# Altium PCB MULTIB.PcbDoc
Units mil, origin at the board's own origin, x right, y up, seen from the top; angles counter-clockwise.
Board outline 2990 x 2190 mil, 2 copper layers (Top Layer, Bottom Layer); 44 components, 45 nets, 197 pads, 34 vias.
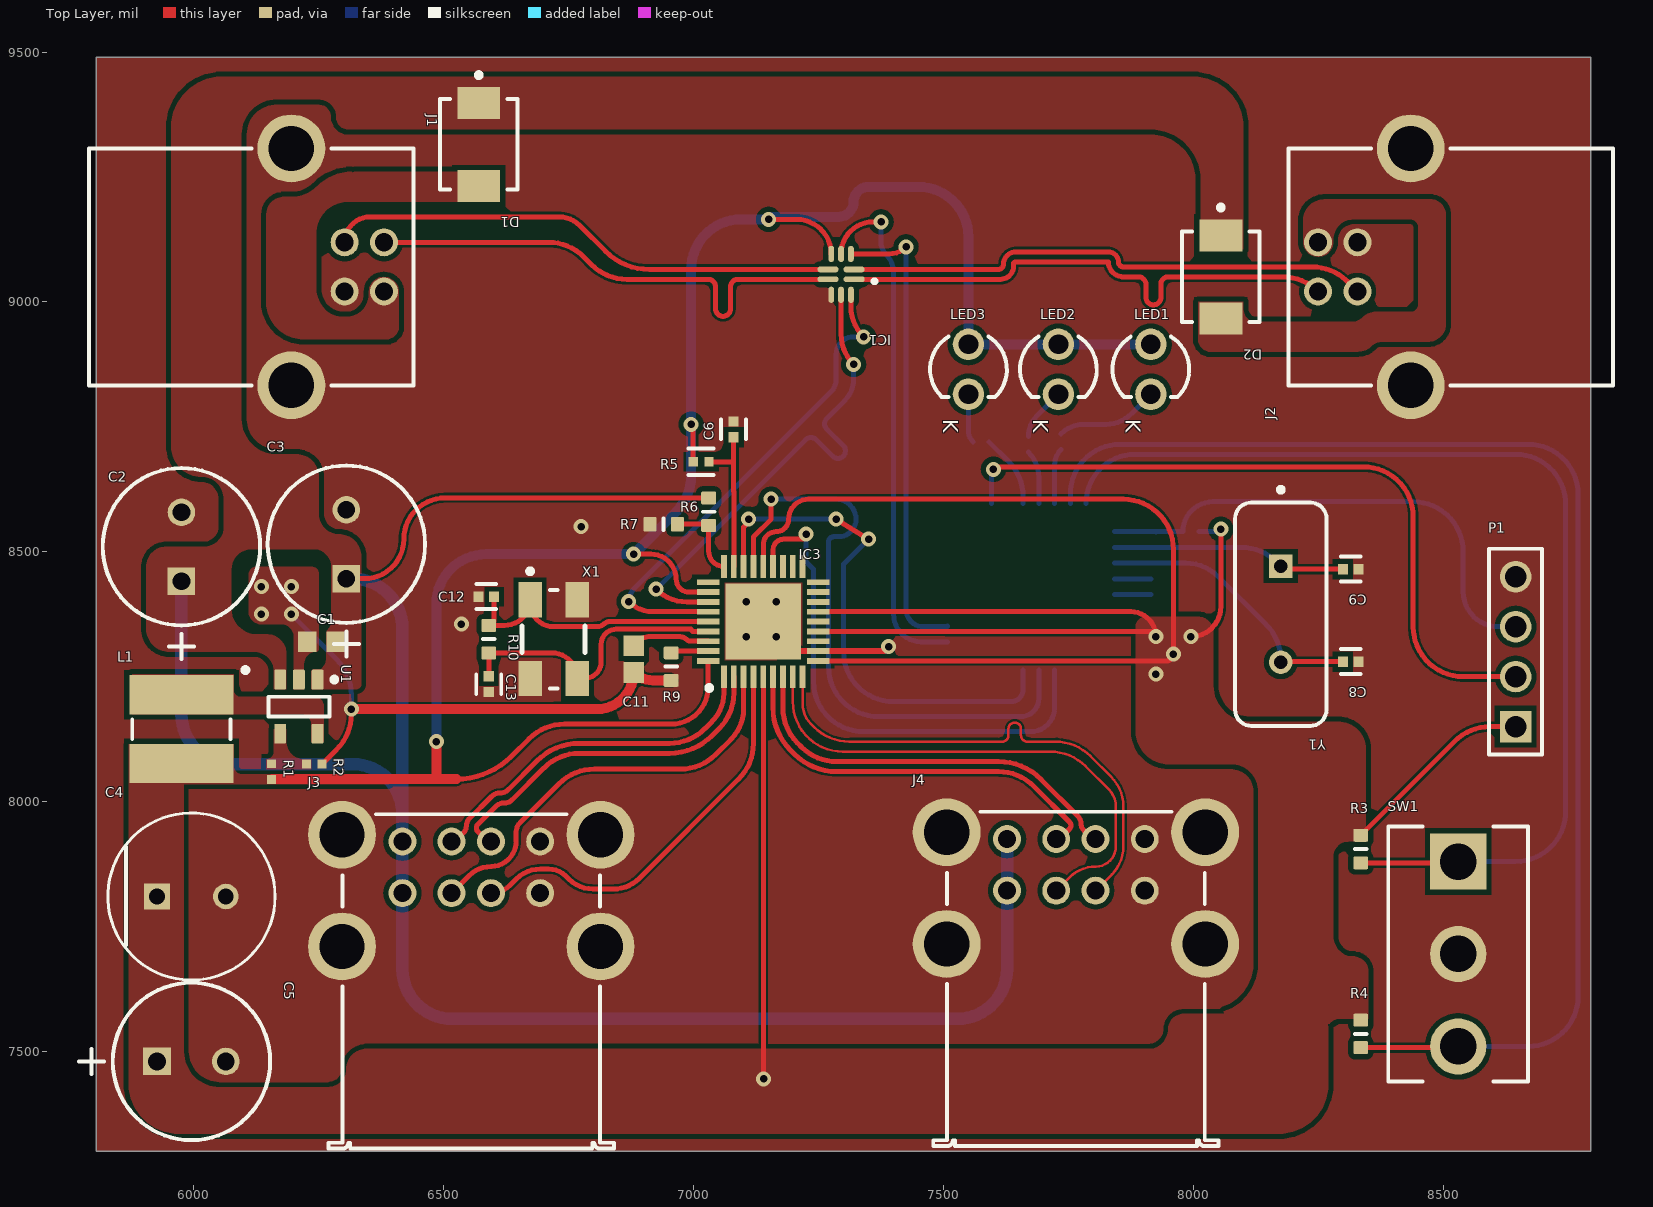
[diagram p0: Top Layer view]
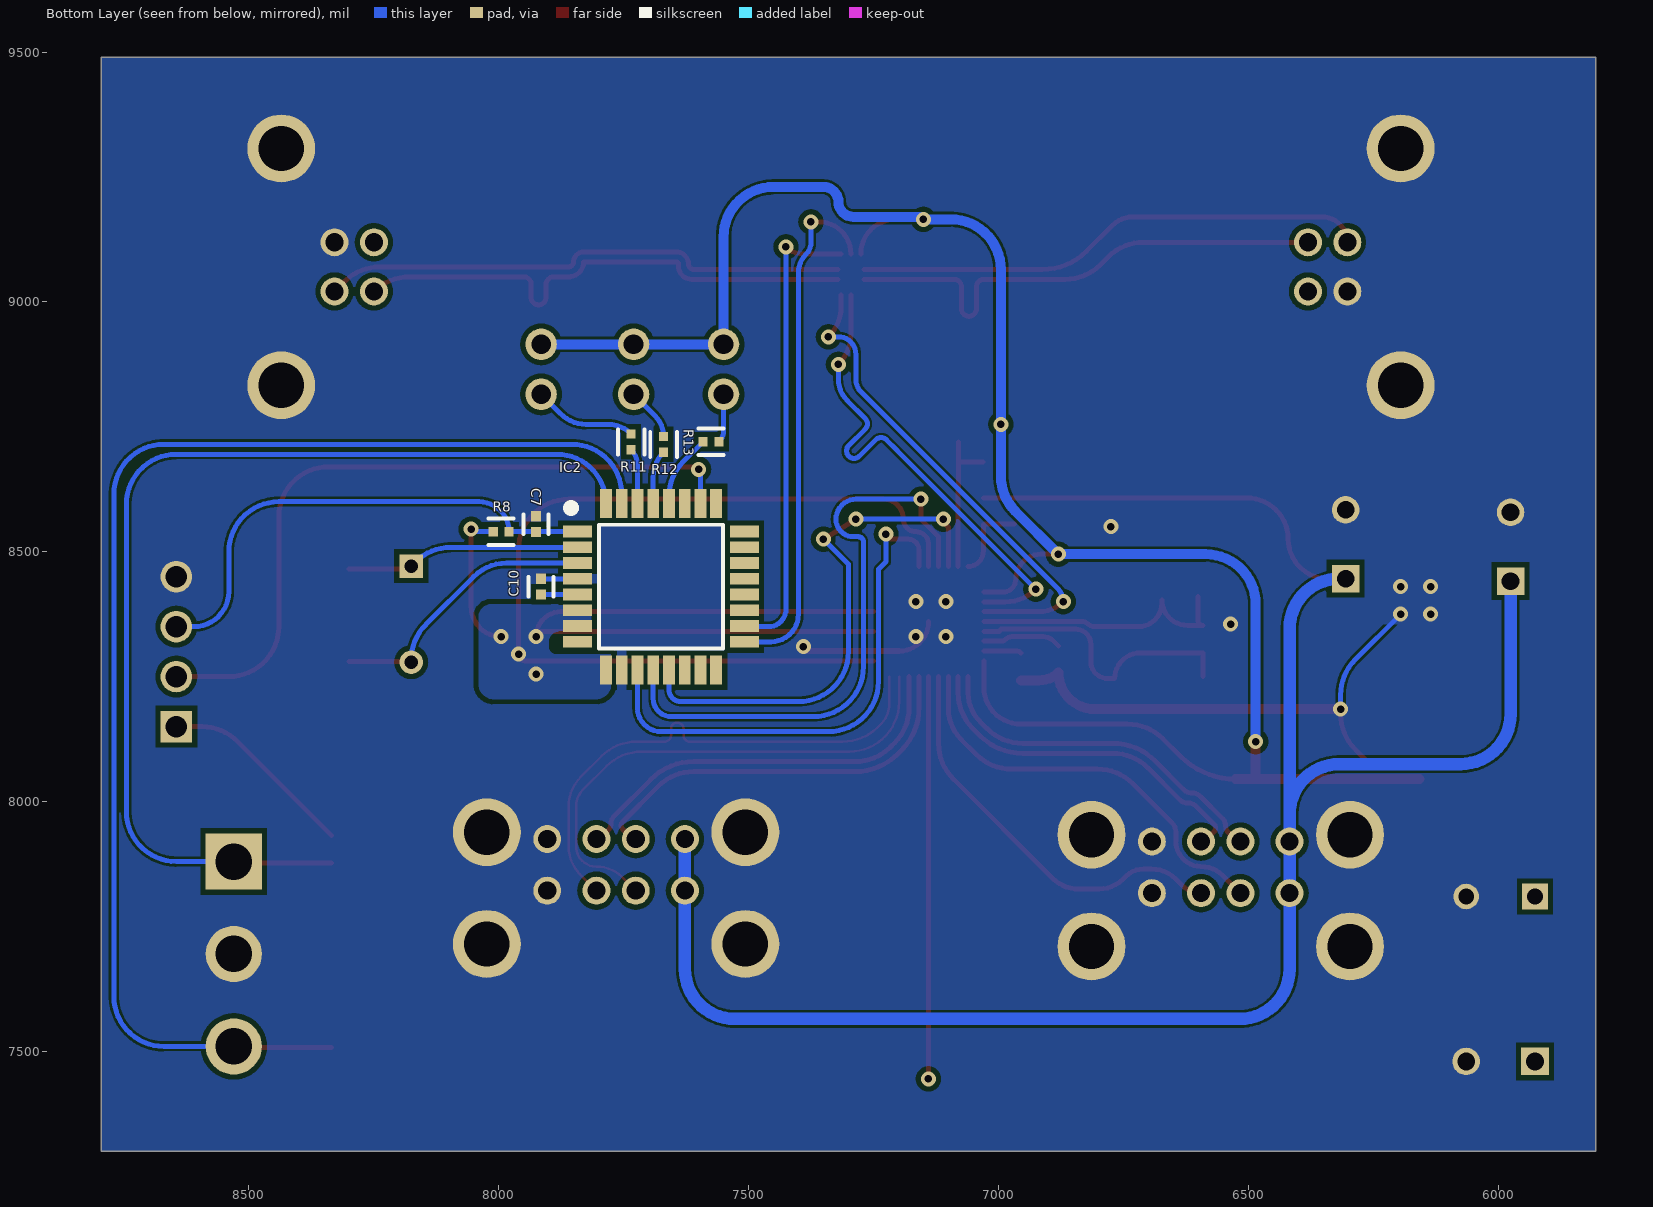
[diagram p1: Bottom Layer view, seen from below]
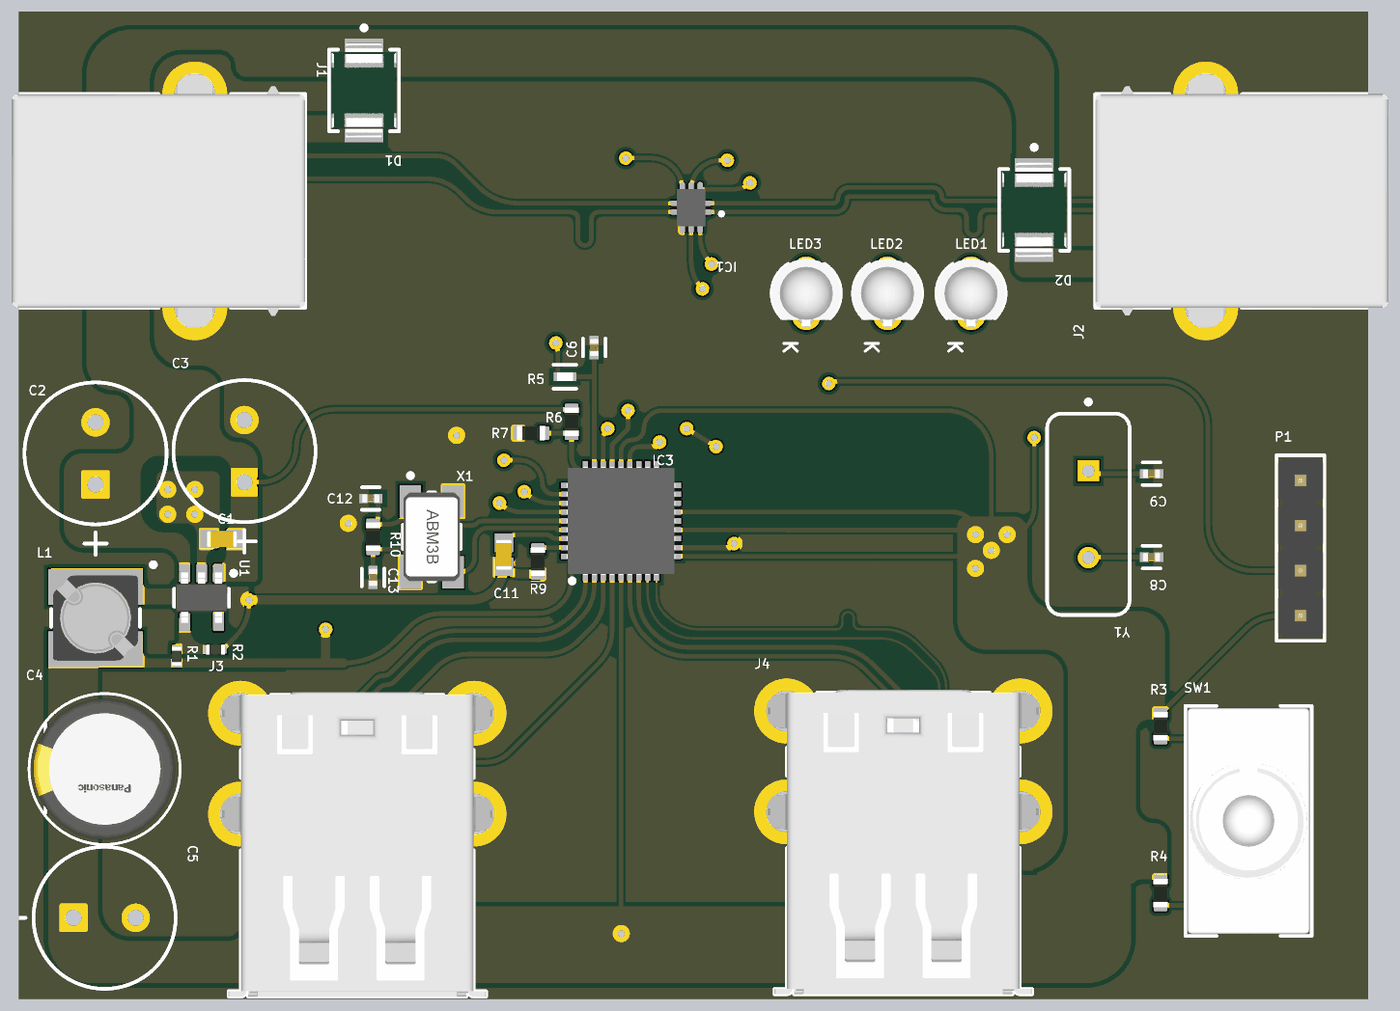
[diagram p2: 3D render of the assembled board from above, using the file's embedded part models]
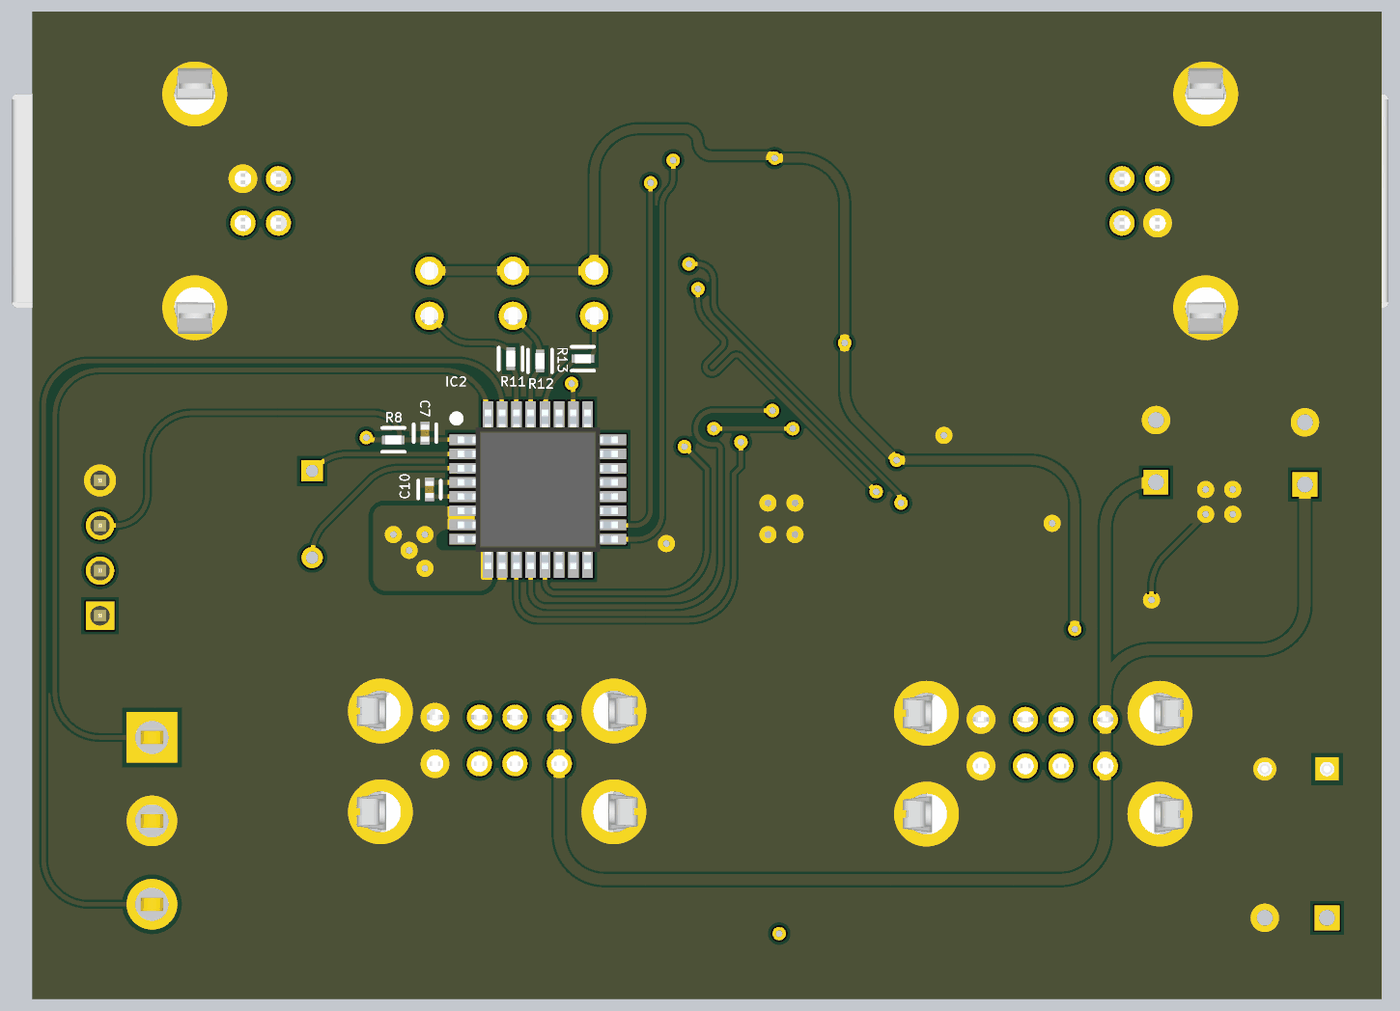
[diagram p3: 3D render of the assembled board from below, using the file's embedded part models]

## Layer stack, top to bottom
Top Solder: solder mask 0.4, Solder Resist, Dk 3.5
Top Layer: signal copper 1.4
Dielectric 1: dielectric 12.6, FR-4, Dk 4.8
Bottom Layer: signal copper 1.4
Bottom Solder: solder mask 0.4, Solder Resist, Dk 3.5

## Board outline
5805,7300 8795,7300 8795,9490 5805,9490

## Design rules (kind name [scope] priority, off if disabled: settings)
Clearance [All] p1: gap=5 ignorepadtopadclearanceinfootprint=TRUE except(0: Arc-Hole Track-Hole SMDPad-Hole THPad-Hole Via-Hole Fill-Hole Poly-Hole Region-Hole Text-Hole; 1: SMDPad-SMDPad SMDPad-THPad THPad-THPad; 4: Arc-Text Track-Text SMDPad-Text THPad-Text Via-Text Fill-Text Poly-Text Region-Text Text-Text; 10: SMDPad-Fill SMDPad-Poly SMDPad-Region THPad-Fill THPad-Poly THPad-Region Via-Fill Via-Poly Via-Region Fill-Fill Fill-Poly Fill-Region Poly-Poly Poly-Region Region-Region)
DiffPairsRouting [All] p1: maxlimit=100 minlimit=1 mostfreqgap=10 toplayer_minwidth=1 toplayer_maxwidth=15 toplayer_prefwidth=15 bottomlayer_minwidth=1 bottomlayer_maxwidth=15 bottomlayer_prefwidth=15 maxuncoupledlength=500
MinimumSolderMaskSliver [All] p1: minsoldermaskwidth=1
PlaneClearance [All] p1: clearance=50
PolygonConnect [All] p1: connectstyle=Direct reliefconductorwidth=10 reliefentries=4 polygonreliefangle="90 Angle" airgapwidth=10
RoutingTopology [All] p1: topology=Daisy_Balanced
RoutingVias [All] p1: holewidth=28 width=50 viastyle="Through Hole" minholewidth=28 minwidth=50 maxholewidth=28 maxwidth=50
SilkToSilkClearance [All] p1: silktosilkclearance=1
SilkToSolderMaskClearance [IsPad] p1: minsilkscreentomaskgap=1 clearancetoexposedcopper=TRUE
SolderMaskExpansion [All] p1: expansion=4 istentingtop=FALSE
Width [All] p1: maxlimit=100 minlimit=1 preferedwidth=10
24 further rules are at their usual default settings.

## Classes and differential pairs
differential pair USB_TOP_2: +USB_TOP_2_P -USB_TOP_2_N
differential pair USB_TOP_1: +USB_TOP_1_P -USB_TOP_1_N
differential pair USB_MUX: +USB_MUX_P -USB_MUX_N
differential pair USB_B4: +USB_B4_P -USB_B4_N
differential pair USB_B3: +USB_B3_P -USB_B3_N
differential pair USB_B2: +USB_B2_P -USB_B2_N
differential pair USB_B1: +USB_B1_P -USB_B1_N

## Components (designator, comment, footprint, x,y, rotation, side; value= is the part's Value field where it differs from the comment)
C1 "100nF" CAPC1608X90X35ML10T15 6255,8320 r0 top
C2 "100uF" CAPPR65-350-1150X800X1250 5975,8510 r90 top
C3 "100uF" CAPPR65-350-1150X800X1250 6305,8515 r90 top
C4 "220uF" FP-EEU-FC1V221L-MFG 5995,7810 r0 top
C5 "100uF" CAPPR65-350-1150X800X1250 5995,7480 r0 top
C6 "C0402  104" FP-C0402-BB-MFG 7080,8745 r90 top value="0.10 μF"
C7 "C0402  104" FP-C0402-BB-MFG 7925,8555 r270 bottom value="0.10 μF"
C8 "C0402" FP-C0402-BB-MFG 8315,8280 r180 top value="0.10 μF"
C9 "C0402" FP-C0402-BB-MFG 8315,8465 r180 top value="0.10 μF"
C10 "C0402" FP-C0402-BB-MFG 7915,8430 r90 bottom value="0.10 μF"
C11 "Capacitor 10 pF +/- 5% 50 V 0603" CAPC1608X90X40ML10T20 6880,8285 r90 top value=10pF
C12 "C0402" FP-C0402-BB-MFG 6585,8410 r0 top value="0.10 μF"
C13 "C0402" FP-C0402-BB-MFG 6590,8235 r270 top value="0.10 μF"
D1 "SMBJ5.0A-TR" FP-SMB-MFG 6570,9315 r270 top
D2 "SMBJ5.0A-TR" FP-SMB-MFG 8055,9050 r270 top
IC1 "USB3740B-AI9-TR" USB3740BAI9TR 7295,9055 r180 top
IC2 "STM8S105K4T6C" QFP80P900X900X160-32N 7675,8430 r180 bottom
IC3 "USB2514B-AEZC-TR" QFN50P600X600X100-37N-D 7139.37,8360.24 r90 top
J1 "61400416121" 61400416121 6115,9070 r270 top
J2 "61400416121" 61400416121 8515,9070 r90 top
J3 "61400826021" 61400826021 6555,7640 r0 top
J4 "61400826021" 61400826021 7765,7645 r0 top
L1 "10uH" "WE-SPC 4838" 5975,8145 r270 top
LED1 "151031SS06000" "Type 3mm" 7915,8865 r270 top
LED2 "151031SS06000" "Type 3mm" 7730,8865 r270 top
LED3 "151031SS06000" "Type 3mm" 7550,8865 r270 top
P1 "61300411121" 61300411121 8645,8300 r90 top
R1 "3.2kR" RESC1005X40X25LL05T05 6155,8060 r270 top
R2 "3.2kR" RESC1005X40X25LL05T05 6240.75,8075 r180 top
R3 "120R3J" RESC0603(1608)_L 8335,7905 r90 top value=51kΩ
R4 "120R3J" RESC0603(1608)_L 8335,7535 r90 top value=51kΩ
R5 "R0402" FP-CRCW0402-e3-IPC_C 7015,8680 r180 top
R6 "120R3J" RESC0603(1608)_L 7030,8580 r270 top value=51kΩ
R7 "120R3J" RESC0603(1608)_L 6940,8555 r0 top value=51kΩ
R8 "R0402" FP-CRCW0402-e3-IPC_C 7995,8540 r0 bottom
R9 "120R3J" RESC0603(1608)_L 6955,8270 r90 top value=12kΩ
R10 "120R3J" RESC0603(1608)_L 6590,8325 r270 top value=1MΩ
R11 "R0402" FP-CRCW0402-e3-IPC_C 7735,8720 r90 bottom
R12 "R0402" FP-CRCW0402-e3-IPC_C 7670,8715 r90 bottom
R13 "R0402" FP-CRCW0402-e3-IPC_C 7575,8720 r180 bottom
SW1 "A101SYCB04" FP-A101SYCB04-MFG 8530,7695 r0 top
U1 "LM3671MF-3.3/NOPB" DBV0005A_N 6210,8190 r270 top
X1 "ABM3B-24.000MHZ-B2-T" ABRA-ABM3B-4_V 6720,8325 r270 top
Y1 "FOXSLF/080-20" FOX-FOXSLF080-20 8175,8375 r270 top

## Footprints (in the part's own frame and the unit in brackets; to place one, negate y for a bottom-side part, rotate by r counter-clockwise, add the part's x,y. Pads: shape width x height; smd on the part's side, far side on the other; paste and mask are expansions set on the pad)
61300411121 [mm] "Pin Header, pitch 2.54 mm, THT, Vertical, single row, 4p"
  rect 1.6x1.6 hole 1.1: 1(-3.81,0)
  round 1.6 hole 1.1: 2(-1.27,0) 3(1.27,0) 4(3.81,0)
  silkscreen extent -5.23,-1.34 5.23,1.34, body extent -5.08,-1.27 5.08,1.27, height 8.57
61400416121 [mm] "USB 2.0 Type B Horizontal"
  round 1.42 hole 0.92: 1(1.25,6.74) 2(-1.25,6.74) 3(-1.25,4.74) 4(1.25,4.74)
  round 3.45 hole 2.3: Shell(-6.02,2.03) Shell(6.02,2.03)
  silkscreen extent -6.02,-8.25 6.02,8.25, body extent -7.48,-8.25 7.48,8.25, height 11.08
61400826021 [mm] "USB 2.0 Type A Horizontal Dual Stacked"
  round 1.42 hole 0.92: 1(-3.5,7.11) 2(-1,7.11) 3(1,7.11) 4(3.5,7.11) 5(-3.5,4.49) 6(-1,4.49) 7(1,4.49) 8(3.5,4.49)
  round 3.45 hole 2.3: Shell(-6.57,1.78) Shell(-6.57,7.46) Shell(6.57,1.78) Shell(6.57,7.46)
  silkscreen extent -7.25,-8.5 7.25,8.5, body extent -7.91,-8.5 7.91,8.65, height 15.93
ABRA-ABM3B-4_V [mm] "SMD, 4-Leads, Body 5x3.2mm"
  rect 1.8x1.2 smd: 1(-2,-1.2) 2(2,-1.2) 3(2,1.2) 4(-2,1.2)
  silkscreen extent -3.57,-1.6 2.5,1.6, body extent -2.5,-1.59 2.5,1.59, height 1.13
CAPC1608X90X35ML10T15 [mm] "Chip Capacitor, 2-Leads, Body 1.7x0.9mm, IPC Low Density"
  rect 0.95x1.05 smd: 1(-0.725,0) 2(0.725,0)
  body extent -0.85,-0.45 0.85,0.45, height 0.9
CAPC1608X90X40ML10T20 [mm] "Chip Capacitor, 2-Leads, Body 1.70x0.90mm, IPC Low Density"
  rect 1.05x1.05 smd: 1(-0.675,0) 2(0.675,0)
  body extent -0.85,-0.45 0.85,0.45, height 0.9
CAPPR65-350-1150X800X1250 [mm] "THD, 2-Leads, Dia 8mm, Body 11.5mm"
  rect 1.4x1.4 hole 0.9: 1(-1.75,0)
  round 1.4 hole 0.9: 2(1.75,0)
  silkscreen extent -5.71,-4 4,4, body extent -4,-4 4,4, height 12.5
DBV0005A_N [mm] "SOT23, 5-Leads, Body 3.05x1.75mm, Pitch 0.95mm, IPC Medium Density"
  rrect17% 1x0.6 smd: 1(-1.375,0.95) 2(-1.375,0) 3(-1.375,-0.95) 4(1.375,-0.95) 5(1.375,0.95)
  silkscreen extent -1.5,-1.55 0.5,1.93, body extent -1.42,-1.46 1.42,1.46, height 1.08
FOX-FOXSLF080-20 [mm] "THD, 2-Leads, Body 11.35x4.65mm"
  rect 1.2x1.2 hole 0.7: 1(-2.44,0)
  round 1.2 hole 0.7: 2(2.44,0)
  silkscreen extent -6.45,-2.33 5.68,2.33, body extent -5.67,-2.32 5.68,2.33, height 3.6
FP-A101SYCB04-MFG [mil]
  rect 112.37x112.37 hole 73 paste-39370.1 mask+0: 1(0,185)
  round 112.37 hole 73 paste-39370.1 mask+0: 2(0,0) 3(0,-185)
  silkscreen extent -140,-255 140,255, body extent -144,-259 144,259, height 10
FP-C0402-BB-MFG [mm]
  rect 0.52x0.52 smd paste+0 mask+0: 1(-0.4,0) 2(0.4,0)
  silkscreen extent -0.5,-0.64 0.5,0.64, body extent -0.5,-0.25 0.5,0.25, height 0.55
FP-CRCW0402-e3-IPC_C [mil]
  rect 18.43x18.6 smd paste+0 mask+0: 1(-15.83,0) 2(15.83,0)
  silkscreen extent -25,-27 25,27, body extent -29,-15 29,15, height 10
FP-EEU-FC1V221L-MFG [mm]
  rect 1.3x1.3 hole 0.8 paste-1000 mask+0: 1(-1.75,0)
  round 1.3 hole 0.8 paste-1000 mask+0: 2(1.75,0)
  silkscreen extent -4.25,-4.25 4.25,4.25, body extent -4.35,-4.35 4.35,4.35, height 0.25
FP-SMB-MFG [mm]
  rect 1.62x2.18 smd paste+0 mask+0: 1(-2.11,0) 2(2.11,0)
  silkscreen extent -3.65,-1.98 2.3,1.98, body extent -3.02,-2.07 3.02,2.07, height 0.25
QFN50P600X600X100-37N-D [mm]
  rect 1.15x0.3 smd: 1(-2.8,2) 2(-2.8,1.5) 3(-2.8,1) 4(-2.8,0.5) 5(-2.8,0) 6(-2.8,-0.5) 7(-2.8,-1) 8(-2.8,-1.5) 9(-2.8,-2) 19(2.8,-2) 20(2.8,-1.5) 21(2.8,-1) 22(2.8,-0.5) 23(2.8,0) 24(2.8,0.5) 25(2.8,1) 26(2.8,1.5) 27(2.8,2)
  rect 0.3x1.15 smd: 10(-2,-2.8) 11(-1.5,-2.8) 12(-1,-2.8) 13(-0.5,-2.8) 14(0,-2.8) 15(0.5,-2.8) 16(1,-2.8) 17(1.5,-2.8) 18(2,-2.8) 28(2,2.8) 29(1.5,2.8) 30(1,2.8) 31(0.5,2.8) 32(0,2.8) 33(-0.5,2.8) 34(-1,2.8) 35(-1.5,2.8) 36(-2,2.8)
  rect 3.85x3.85 smd: 37(0,0)
  silkscreen extent -3.5,2.62 -3.25,2.87, body extent -3.05,-3.05 3.05,3.05, height 1
QFP80P900X900X160-32N [mm]
  rect 1.475x0.6 smd: 1(-4.238,2.8) 2(-4.238,2) 3(-4.238,1.2) 4(-4.238,0.4) 5(-4.238,-0.4) 6(-4.238,-1.2) 7(-4.238,-2) 8(-4.238,-2.8) 17(4.238,-2.8) 18(4.238,-2) 19(4.238,-1.2) 20(4.238,-0.4) 21(4.238,0.4) 22(4.238,1.2) 23(4.238,2) 24(4.238,2.8)
  rect 0.6x1.475 smd: 9(-2.8,-4.238) 10(-2,-4.238) 11(-1.2,-4.238) 12(-0.4,-4.238) 13(0.4,-4.238) 14(1.2,-4.238) 15(2,-4.238) 16(2.8,-4.238) 25(2.8,4.238) 26(2,4.238) 27(1.2,4.238) 28(0.4,4.238) 29(-0.4,4.238) 30(-1.2,4.238) 31(-2,4.238) 32(-2.8,4.238)
  silkscreen extent -4.77,-3.15 3.15,4.2, body extent -4.5,-4.5 4.5,4.5, height 1.6
RESC0603(1608)_L [mil] "Chip Resistor, Body 1.6x0.8mm, IPC High Density"
  rrect25% 26x29.92 smd: 1(-27.56,0) 2(27.56,0)
  silkscreen extent 0,-12 0,12, body extent -31,-16 31,16, height 18
RESC1005X40X25LL05T05 [mm] "Chip Resistor, 2-Leads, Body 1.05x0.55mm, IPC High Density"
  rect 0.45x0.45 smd: 1(-0.4,0) 2(0.4,0)
  body extent -0.53,-0.28 0.53,0.28, height 0.4
"Type 3mm" [mm] "THT, LED-3mm, 2pin- Body 4.15mm(max)"
  round 1.6 hole 1: 1(1.27,0) 2(-1.27,0)
  silkscreen extent -1.66,-1.95 1.4,1.95, body extent -1.93,-1.94 1.87,1.94, height 10.5
USB3740BAI9TR [mm]
  rrect100% 1.075x0.3 smd: 1(-0.663,0.25) 2(-0.663,-0.25) 6(0.663,-0.25) 7(0.663,0.25)
  rrect100% 0.3x0.825 smd: 3(-0.5,-1.037) 4(0,-1.037) 5(0.5,-1.037) 8(0.5,1.038) 9(0,1.038) 10(-0.5,1.038)
  silkscreen extent -1.8,0.25 -1.6,0.45, body extent -0.8,-1.05 0.8,1.05, height 0.7
"WE-SPC 4838" [mm] "SMD Inductor, 2- pin, Body 4.80 x 4.80mm"
  rect 2x5.3 smd: 1(-1.75,0) 2(1.75,0)
  silkscreen extent -3.12,-2.5 0.5,3.37, body extent -2.41,-2.41 2.41,2.41, height 3.8

## Part data
C1: library part CMP-2000-04945-1, "Chip Capacitor, 22 pF, +/- 5%, 50 V, -55 to 125 degC, 0603 (1608 Metric), RoHS, Tape and Reel", Capacitance=22pF, Case Size/Dimension=0603, Dielectric=C0G, Manufacturer=Murata, Package Description="2-Pin Surface Mount Device, Body 1.6 x 0.8 mm", Package Reference=603, Rated Voltage=50V, Tolerance (%)=±5%, Datasheet URL=https://datasheet.ciiva.com/11786/0900766b807a1cab-11786398.pdf, Datasheet Version=Jul-06, Manufacturer URL=http://www.murata.com/
C2 C3 C5: library part CMP-1665-00042-2, "Aluminum Electrolytic Capacitor, 100 uF, +/- 20%, 50 V, -40 to 85 degC, 2-Pin THD, RoHS, Bulk", Case/Package=Radial, Dielectric Material=Aluminium, Leakage Current=3uA, Manufacturer=Panasonic, Max Operating Temperature=85degC, Min Operating Temperature=-40degC, Package Description="2-Pin Radial Lead, Dia 8 mm, Height 12.5 mm", Package Quantity=200, Package Reference=CAPPR65-350-1150X800X1250, Ripple Current=250mA, Tolerance=20%, Voltage=50V, Capacitance=100uF, Datasheet URL=https://industrial.panasonic.com/cdbs/www-data/pdf/RDF0000/ABA0000C1218.pdf, Datasheet Version="Rev. 05, 10/2016", Diameter=8mm, Dissipation Factor=0.12%, Height=11.5mm, Height - Seated (Max)=0.492inch, Lead Diameter=0.6mm, Lead Free=LeadFree, Lead Pitch=3.5mm, Lead/Base Style=Straight, Length=11.5mm, Life (Hours)=2000Hour, Manufacturer URL=http://www.panasonic.com/, Mount=ThroughHole, Number of Pins=2, Packaging=Bulk, Polarity=Polar, Radiation Hardening=No, REACH SVHC=NoSVHC, Ripple Current (AC)=250mA, RoHSCompliant=true, Termination=Radial, Voltage Rating=50V, Voltage Rating (DC)=50V
C4: library part CMP-05427-000010-1, "CAP ALUM 220UF 20% 35V RADIAL", Leakage Current=77uA, Manufacturer="Panasonic Electronic Components", Manufacturer Part Number=EEU-FC1V221L, Package=0, Ripple Current=730mA, Temperature="-55°C to +105°C", Temperature Range High=+105°C, Temperature Range Low=-55°C, Tolerance=20%, Voltage Rating=35V, Automotive=Yes, Automotive Grade="Grade 2", Capacitance=220uF, Category=Cap, ComponentLink2Description=Datasheet, ComponentLink2URL=https://industrial.panasonic.com/cdbs/www-data/pdf/RDF0000/ABA0000C1209.pdf, Device Class L1="Passive Components", Device Class L2=Capacitors, Device Class L3="Aluminum Electrolytic Capacitors", Digikey Description="CAP ALUM 220UF 20% 35V RADIAL", Dissipation Factor=12%, ESR=0.085Ω, Height=16.5mm, Lead Free=Yes, Life=2000Hours, Material=Aluminum, Mouser Description="Capacitor; Aluminum Electrolytic; Fc Radial Elec Cap 220uF 35V", Octopart=https://octopart.com/eeu-fc1v221l-panasonic-39478519, RoHS=TRUE
C6 C7 C8 C9 C10 C12 C13: library part CMP-2008-02046-2, "CAP CER 0.1UF 10V X5R 0402", Capacitance="0.10 μF", Manufacturer=Kemet, Manufacturer Part Number=C0402C104K8PACTU, Package=C0402-BB, Temperature="-55°C to +125°C", Temperature Characteristic=X5R, Temperature Coefficient=15%, Temperature Range High=+125°C, Temperature Range Low=-55°C, Tolerance=0.1, Voltage Rating="10 V", Automotive=No, Category=Cap, ComponentLink2Description=Datasheet, ComponentLink2URL=https://content.kemet.com/datasheets/KEM_C1002_X7R_SMD.pdf, Device Class L1="Passive Components", Device Class L2=Capacitors, Device Class L3="Ceramic Capacitors", Digikey Description="CAP CER 0.1UF 10V X5R 0402", Height=0.55mm, Ipc Land Pattern Name=CAPC10050X50, Lead Free=Yes, Material=Ceramic, Mouser Description="Capacitor 100 nF 10 VDC 0402", Octopart=https://octopart.com/c0402c104k8pactu-kemet-140039, RoHS=TRUE
C11: library part CMP-001-00014-4, "Chip Capacitor, 10 pF, +/- 5%, 50 V, 0603 (1608 Metric)", Capacitor Type=Ceramic, Case/Package=0603, Max Operating Temperature=125°C, Min Operating Temperature=-55°C, Tolerance=5%, Voltage Rating=50V, Mounting Technology=SM, Pins=2, RoHS Compliant=True
D1 D2: library part CMP-12225-000019-1, "TVS DIODE 5V 13.4V SMB", Breakdown Voltage=6.4V, Clamping Voltage=14.4V, Manufacturer=STMicroelectronics, Max Junction Temp=+150°C, Package=SMB, Peak Pulse Current=275A, Peak Pulse Power=600W, Reverse Standoff Voltage=5V, Temperature="-55°C to +150°C", Temperature Range Low=-55°C, Automotive=No, Category=Diode, ComponentLink2Description=Datasheet, ComponentLink2URL=https://www.st.com/resource/en/datasheet/smbj.pdf, Device Class L1="Circuit Protection", Device Class L2="TVS Diodes", Device Class L3=unset, Digikey Description="TVS DIODE 5V 13.4V SMB", Direction=Unidirectional, Height=2.65mm, Lead Free=Yes, Manufacturer Part Number=SMBJ5.0A-TR, Mouser Description="SMBJ Series 600 W 5 V Uni Directional SMT TVS Diode - DO-214AA", Number Of Channels=1, Octopart=https://octopart.com/smbj5.0a-tr-stmicroelectronics-347079, RoHS=TRUE, Standoff Height=0.05mm, Temperature Range High=+150°C
IC1: "Integrated Circuit", Manufacturer_Name=Microchip, Mouser Part Number=886-USB3740B-AI9-TR, Arrow Part Number=USB3740B-AI9-TR, Arrow Price/Stock=https://www.arrow.com/en/products/usb3740b-ai9-tr/microchip-technology, Datasheet Link=http://www.microchip.com/mymicrochip/filehandler.aspx?ddocname=en562428, Height=0.6mm, Manufacturer_Part_Number=USB3740B-AI9-TR, Mouser Price/Stock=https://www.mouser.co.uk/ProductDetail/Microchip-Technology/USB3740B-AI9-TR/?qs=pA5MXup5wxFFkk8V1NniAg%3D%3D
IC2: "Integrated Circuit", Manufacturer_Name=STMicroelectronics, Mouser Part Number=511-STM8S105K4T6C, Arrow Part Number=STM8S105K4T6C, Arrow Price/Stock=https://www.arrow.com/en/products/stm8s105k4t6c/stmicroelectronics, Datasheet Link=http://www.st.com/st-web-ui/static/active/en/resource/technical/document/datasheet/CD00200092.pdf, Height=1.6mm, Manufacturer_Part_Number=STM8S105K4T6C, Mouser Price/Stock=https://www.mouser.co.uk/ProductDetail/STMicroelectronics/STM8S105K4T6C?qs=YSp3DhtTcU05QnjDVzmM7w%3D%3D
IC3: "Integrated Circuit", Manufacturer_Name=Microchip, Mouser Part Number=886-USB2514B-AEZC-TR, Arrow Part Number=USB2514B-AEZC-TR, Arrow Price/Stock=https://www.arrow.com/en/products/usb2514b-aezc-tr/microchip-technology, Datasheet Link=http://ww1.microchip.com/downloads/en/DeviceDoc/00001692C.pdf, Height=1mm, Manufacturer_Part_Number=USB2514B-AEZC-TR, Mouser Price/Stock=https://www.mouser.co.uk/ProductDetail/Microchip-Technology/USB2514B-AEZC-TR?qs=pA5MXup5wxH7Kbx1p0cM6A%3D%3D
J1 J2: library part CMP-1502-03243-1, "USB 2.0 Type B Receptacle WR-COM, Horizontal, THT, with Pads and Pegs", Contact Resistance=20mOhm, Manufacturer="Wurth Elektronik", Operating Temperature=-40to105degC, Rated Current=1.5A, Working Voltage=30VAC, Connector Type=USB2.0TypeB, Datasheet URL=https://katalog.we-online.de/em/datasheet/61400416121.pdf, Gender=Receptacle, Manufacturer URL=http://www.we-online.de, Mounting Technology=THT, Orientation=Horizontal, Package Reference=61400416121, Packaging=Tray, Part Number=61400416121, Publisher=WurthElektronik
J3 J4: library part CMP-1502-03229-1, "USB 2.0 Type A Receptacle WR-COM, Stacked Horizontal, THT", Contact Resistance=20mOhm, Manufacturer="Wurth Elektronik", Operating Temperature=-40to105degC, Rated Current=1.5A, Working Voltage=30VAC, Connector Type=USB2.0TypeA, Datasheet URL=https://katalog.we-online.de/em/datasheet/61400826021.pdf, Gender=Receptacle, Manufacturer URL=http://www.we-online.de, Mounting Technology=THT, Orientation=StackedHorizontal, Package Reference=61400826021, Packaging=Tray, Part Number=61400826021, Publisher=WurthElektronik
L1: library part CMP-1401-00032-1, "SMD Shielded Power Inductor WE-SPC, L=10 µH", Inductance="10 ÂµH", Manufacturer="Wuerth Elektronik", PartNumber=74408943100, ComponentLink1Description="Manufacturer URL", ComponentLink1URL=http://www.we-online.com, ComponentLink2Description=Datasheet, ComponentLink2URL=http://katalog.we-online.de/kataloge/eisos/media/pdf/74408943100.pdf, PackageReference="WE-SPC 4838"
LED1 LED2 LED3: library part CMP-1488-00002-1, "THT LED round mono-color color lens, WL-TMRW, Super Red", Emitting color="Super Red", Manufacturer="Wuerth Elektronik", ComponentLink1Description="Manufacturer URL", ComponentLink1URL=http://www.we-online.com, ComponentLink2Description=Datasheet, ComponentLink2URL=http://katalog.we-online.de/pbs/datasheet/7448042001.pdfhttp://katalog.we-online.de/pbs/datasheet/7448042001.pdfhttp://katalog.we-online.de/pbs/datasheet/7448042001.pdfhttp://katalog.we-online.de/pbs/datasheet/151031SS06000.pdf, PackageReference="Type 3mm", PartNumber=151031SS06000
P1: library part CMP-1502-01064-1, "THT Vertical Pin Header WR-PHD, Pitch 2.54 mm, Single Row, 4 pins", Contact Resistance=20mOhm, Manufacturer="Wurth Elektronik", Operating Temperature=-40to105degC, Rated Current=3A, Withstanding Voltage=500VAC, Working Voltage=250VAC, Datasheet URL=https://katalog.we-online.de/em/datasheet/6130xx11121.pdf, Gender=Male, Manufacturer URL=http://www.we-online.de, Mounting Technology=THT, Orientation=Vertical, Package Reference=61300411121, Packaging=Bag, Part Number=61300411121, Pin Number=4, Pitch=2.54mm, Publisher=WurthElektronik, Row Number=Single
R1 R2: library part CMP-2002-01154-4, "Chip Resistor, 4.7 KOhm, +/- 1%, 0.1 W, -55 to 155 degC, 0402 (1005 Metric), RoHS, Tape and Reel", Case Code (Imperial)=0402, Case Code (Metric)=1005, Max Operating Temperature="155 degC", Min Operating Temperature="-55 degC", Package Quantity=1, PartNumber=ERJ-2RKF4701X, Power Rating="100 mW", Resistance="4.7 KOhm", Tolerance=1%, Voltage Rating="50 V", Case\/Package=0402, ComponentLink1Description="Manufacturer URL", ComponentLink1URL=http://www.panasonic.com/, ComponentLink2Description=Datasheet, ComponentLink2URL=http://industrial.panasonic.com/cdbs/www-data/pdf/RDA0000/AOA0000C86.pdf, DatasheetVersion=04/2015, Height="0.35 mm", Length="1 mm", Mount="Surface Mount", Mounting Technology="Surface Mount", PackageDescription="2-Pin Surface Mount Device, Body 1 x 0.5 mm", PackageReference=0402, Packaging="Cut Tape", Pins=2, Radiation Hardening=No, REACH SVHC=Yes, RoHSCompliant=true, Width="0.5 mm"
R3 R4 R6 R7 R9 R10: library part CMP-009-00069-1, "120R 0.1W 5% 0603 (1608 Metric)  SMD", Case/Package=0603, Power=0.1W, Tolerance=5%, Mounting Technology=SMT, Pins=2
R5 R8 R11 R12 R13: library part CMP-2002-08519-2, "RES Thick Film, 32.4kΩ, 1%, 0.063W, 100ppm/°C, 0402", Case Code (Imperial)=0402, Case Code (Metric)=1005, Max Operating Temperature=155°C, Max Power Dissipation=63mW, Min Operating Temperature=-55°C, Package Quantity=10, Resistance=32.4kR, Temperature Coefficient=100ppm/°C, Tolerance=1%, Voltage Rating=50V, Case/Package=0402, Composition="Thick Film", Contact Plating=Tin, Depth=0.5mm, Features="Automotive AEC-Q200", Height=0.35mm, Length=1mm, Military Standard=Not, Number of Pins=2, Number of Terminations=2, Packaging="Tape and Reel", Power Rating=63mW, Radiation Hardening=No, Termination=SMD/SMT, Weight=2.3E-05oz, Width=0.5mm
SW1: library part CMP-03408-000017-1, "SWITCH TOGGLE SPDT 0.4VA 20V", Actuator Color=Chrome, Contact Current Rating=400mA, Contact Resistance=10mR, Flammability Rating="UL94 V-1", Insulation Resistance=30MR, Max Operating Temperature=85°C, Max Voltage Rating (AC)=20V, Min Operating Temperature=-30°C, Package Quantity=100, Power Rating=400mW, Actuator Length=10.41mm, Actuator Material=Phenolic, Actuator Type="Standard Round", Contact Material=Copper, Contact Plating=Gold, Depth=6.86mm, Electrical Life=6000Cycles, ELV=Compliant, Illumination Type=Non-Illuminated, Lead Free="Lead Free", Max Voltage Rating (DC)=20V, Mount=Panel, Number of Poles=1, Number of Positions=2, Orientation=Straight, Packaging=Bulk, Radiation Hardening=No, REACH SVHC="No SVHC", RoHS Compliant=Yes, Series="Gemini A", Switch Function=On-On, Termination="PC Pins", Throw Configuration=SPDT, Voltage Rating (AC)=20V, Voltage Rating (DC)=20V
U1: library part CMP-0063-01132-3, "2MHz, 600mA Step-Down DC-DC Converter, 5-pin SOT-23, Pb-Free", Manufacturer="Texas Instruments", PackageTopMarking=SJEB*XTT, PowerWise=Y, ComponentLink1Description="Datasheet URL", ComponentLink1URL=http://www.ti.com/general/docs/lit/getliterature.tsp?genericPartNumber=LM3671&fileType=pdf, CompType=MiscPower, PackageDescription="Molded SOT-23, .115 x .063 x .040 in Body, 5 Lead, .0375 in Pitch", PackageReference=DBV0005A, PinCount=5, RoHS=Y
X1: library part CMP-1688-00008-1, "Ceramic SMD Crystal, 24 MHz, +/- 20 ppm, 50 Ohm, -20 to 70 degC, 4-Pin SMD, RoHS, Tape and Reel", Frequency="6 Hz", Max Operating Temperature="155 degC", Min Operating Temperature="-40 degC", Package Quantity=2500, ComponentLink1Description="Manufacturer URL", ComponentLink1URL=http://www.abracon.com/, ComponentLink2Description=Datasheet, ComponentLink2URL=http://www.abracon.com/Resonators/abm3b.pdf, Contact Material=Brass, Contact Plating=Gold, DatasheetVersion=Aug-15, Fastening Type=Snap, Height="1.244 mm", Impedance="50 Ohm", Length="2.6 mm", Mating Cycles=30, Mount="Surface Mount", PackageDescription="4-Pin Surface Mount Device, Body 5 x 3.2 mm", PackageReference=ABM3B, Packaging="Tape and Reel", Radiation Hardening=No, REACH SVHC=Unknown, RoHSCompliant=true, Weight="0.001058 oz", Width="3 mm"
Y1: library part CMP-1749-00002-1, "Resistance Weld Thru-Hole Crystal, 8 MHz, -20 to 70 degC, 2-Pin THD, RoHS, Bulk", Case\Package=TO-263-3, Dropout Voltage="2 V", Max Input Voltage="35 V", Max Operating Temperature="125 degC", Max Ouput Current="1 A", Min Input Voltage="7 V", Min Operating Temperature="0 degC", Nominal Output Voltage="5 V", Package Quantity=50, ComponentLink1Description="Manufacturer URL", ComponentLink1URL=http://www.foxonline.com/, ComponentLink2Description=Datasheet, ComponentLink2URL=http://download.siliconexpert.com/pdfs/2015/4/5/6/5/7/200/fox_/manual/35607121449963728hc49slf.pdf, DatasheetVersion=Mar-15, Height="30.02 mm", Length="10.24 mm", Mount="Surface Mount", Output Current="1 A", Output Voltage="5 V", Outputs=1, PackageDescription="2-Pin Through Hole Device, Body 11.35 x 4.65 mm", PackageReference=FOXSLF080-20, Packaging=Rail/Tube, Pins=3, Radiation Hardening=No, REACH SVHC="No SVHC", RoHSCompliant=true, Width="9.35 mm"

## Via types
v1: diameter 30, hole 15, Top Layer to Bottom Layer, 34 vias

## Nets (pads, with @x,y where several pads share a name; then routed paths per layer and width w, separated by ;. In a path a pad name is that pad's centre, name@x,y a point inside that pad or via, vN(x,y) a via of type N, cw(c..) or ccw(c..) an arc to the next point about the centre after c; other vN are vias at no path point)
3.3V: C4.1 C5.1 IC1.5 IC2.6 IC2.7 IC2.9 IC3.5 IC3.10 IC3.13 IC3.15 IC3.23 IC3.29 IC3.36 L1.2 LED1.2 LED2.2 LED3.2 P1.1 R1.2 R3.2 R4.2 R5.2 R8.2 | length 9002.7
  Top Layer w10: R1.2 cw(c6156.81,8042.45) R1.2@6156.81,8045 ; 6525,8045 ccw(c6525,8201.92) 6636,8091 6670.71,8125.71 cw(c6741.42,8055) 6741.42,8155 6955,8155 ccw(c6955,8229.13) 7029.13,8229.13 IC3.36 ; v1(6880,8495) 6915,8495 cw(c6915,8445) 6965,8445 ccw(c6990.71,8445) 6990.71,8419.29 IC3.29 ; v1(6995,8755) cw(c6984.94,8744.94) 6999.17,8744.94 R5.2 ; IC3.23 7139.37,8514.37 ; v1(7140,7445) 7139.37,7445 IC3.5 IC3.5@7140,8249.37 ; v1(7150,9165) 7206.14,9165 cw(c7206.14,9095.83) IC1.5 ; IC3.10 7946.5,8281.5 ccw(c7946.5,8295) v1(7960,8295) 7960,8505 ccw(c7860,8505) 7860,8605 7230,8605 ccw(c7230,8565) 7190,8565 ; IC3.13 7505,8340.55 7505,8340 7915,8340 cw(c7915,8330) v1(7925,8330) ccw(c7875.08,8330) 7875.08,8379.92 IC3.15 ; v1(7995,8330) ccw(c7995,8390) 8055,8390 v1(8055,8545) ; R3.2 8523.15,8120.71 cw(c8593.86,8050) 8593.86,8150 P1.1 ; 7139.37,8514.37 cw(c7165,8514.37) 7165,8540 ; 7139.37,8514.37 cw(c7165,8514.37) 7165,8540 ; 7165,8540 ccw(c7165,8565) 7190,8565 ; 7165,8540 ccw(c7165,8565) 7190,8565
  Top Layer w20: R1.2@6156.81,8045 6485,8045 ; v1(6485,8120) 6485,8045 ; 6525,8045 6485,8045
  Bottom Layer w10: R8.2 8050,8540 ccw(c8050,8545) v1(8055,8545)
  Bottom Layer w20: v1(6485,8120) 6485,8395 cw(c6585,8395) 6585,8495 v1(6880,8495) 6965.71,8580.71 ccw(c6895,8651.42) 6995,8651.42 v1(6995,8755) 6995,9065 cw(c7095,9065) 7095,9165 v1(7150,9165) 7155,9170 7290,9170 ccw(c7290,9200) 7320,9200 cw(c7350,9200) 7350,9230 7450,9230 cw(c7450,9130) 7550,9130 LED3.2 LED2.2 LED1.2
  other v1: 7925,8255
5V: C1.2 C2.1 C3.1 D1.1 D2.1 J3.1 J3.5 J4.1 J4.5 R6.1 U1.1 U1.3 | length 5113.1
  Top Layer w10: C3.1 6341.1,8446.1 ; R6.1 6502.56,8607.56 ; 6341.1,8446.1 ccw(c6341.1,8525) 6420,8525 ; 6341.1,8446.1 ccw(c6341.1,8525) 6420,8525 ; 6420,8525 cw(c6502.56,8525) 6502.56,8607.56 ; 6420,8525 cw(c6502.56,8525) 6502.56,8607.56
  Bottom Layer w25: C2.1 5975,8175 ; C3.1 C3.1@6317.2,8446.1 ; J4.1 J4.5 7627.2,7665 ; 5975,8175 ccw(c6075,8175) 6075,8075 ; 5975,8175 ccw(c6075,8175) 6075,8075 ; 6075,8075 6317.2,8075 ; 6317.2,8075 cw(c6317.2,7975) 6417.2,7975 ; 6317.2,8075 cw(c6317.2,7975) 6417.2,7975 ; C3.1@6317.2,8446.1 cw(c6317.2,8346.1) 6417.2,8346.1 ; C3.1@6317.2,8446.1 cw(c6317.2,8346.1) 6417.2,8346.1 ; 6417.2,7665 ccw(c6517.2,7665) 6517.2,7565 ; 6417.2,7665 ccw(c6517.2,7665) 6517.2,7565 ; 6417.2,7665 J3.5 J3.1 6417.2,7975 ; 6417.2,7975 6417.2,8346.1 ; 6517.2,7565 7527.2,7565 ; 7527.2,7565 ccw(c7527.2,7665) 7627.2,7665 ; 7527.2,7565 ccw(c7527.2,7665) 7627.2,7665
GND: C1.1 C2.2 C3.2 C4.2 C5.2 C6.2 C7.1 C8.1 C9.1 C10.2 C11.1 C12.1 C13.2 IC1.8 IC2.4 IC2.10 IC3.11 IC3.37 J1.4 J1.Shell J2.4 J2.Shell J3.4 J3.8 J3.Shell J4.4 J4.8 J4.Shell P1.4 R2.1 R7.1 R9.1 SW1.2 U1.2 X1.2 X1.4 | length 1414
  Top Layer w10: R2.1 6285.71,8104.21 ccw(c6215,8174.93) 6315,8174.93 v1(6315,8185) ; IC3.37 ccw(c7198.42,8360.24) IC3.37@7198.42,8301.18 ; v1@7381.18,8301.18 ccw(c7381.18,8310) v1(7390,8310)
  Top Layer w12: IC3.37@7198.42,8301.18 IC3.11 v1@7381.18,8301.18
  Top Layer w20: v1(6315,8185) 6806.57,8185 ccw(c6806.57,8258.43) C11.1 ccw(c6918.59,8297.02) 6918.59,8242.44 R9.1
  Bottom Layer w10: v1(6195,8375) 6285.71,8284.29 cw(c6215,8213.58) 6315,8213.58 v1(6315,8185) ; IC2.4 C10.2
  other v1: 7105,8330 7165,8330 6535,8355 6135,8375 7105,8400 7165,8400 6135,8430 6195,8430 6775,8550
LED0: IC2.30 R11.1 | length 110.7
  Bottom Layer w10: IC2.30 7722.24,8673.37 cw(c7765.8,8673.37) R11.1
LED1: IC2.29 R12.1 | length 107.9
  Bottom Layer w10: R12.1 cw(c7619.91,8649.08) 7690.75,8649.08 IC2.29
LED2: IC2.28 R13.1 | length 147.2
  Bottom Layer w10: R13.1 7629.96,8680.87 cw(c7559.25,8610.16) 7659.25,8610.16 IC2.28
NetC8_2: C8.2 IC2.3 Y1.2 | length 712.9
  Top Layer w10: C8.2 Y1.2@8177.56,8280 ; Y1.2@8177.56,8280 ccw(c8177.56,8276.37) Y1.2 cw(c8177.56,8276.37) Y1.2@8177.56,8280
  Bottom Layer w10: IC2.3 7984.23,8477.24 ; Y1.2 Y1.2@8175,8283.58 ; 7984.23,8477.24 cw(c7984.23,8384.23) 8050,8450 ; 7984.23,8477.24 cw(c7984.23,8384.23) 8050,8450 ; 8050,8450 8145.71,8354.29 ; 8145.71,8354.29 cw(c8075,8283.58) Y1.2@8175,8283.58 ; 8145.71,8354.29 cw(c8075,8283.58) Y1.2@8175,8283.58
NetC9_2: C9.2 IC2.2 Y1.1 | length 565.1
  Top Layer w10: C9.2 Y1.1@8189.64,8465 ; Y1.1@8189.64,8465 cw(c8189.64,8485.7) Y1.1 ccw(c8189.64,8485.7) Y1.1@8189.64,8465
  Bottom Layer w10: IC2.2 8095.9,8508.74 ; Y1.1 Y1.1@8166.61,8479.45 ; 8095.9,8508.74 cw(c8095.9,8408.74) Y1.1@8166.61,8479.45 ; 8095.9,8508.74 cw(c8095.9,8408.74) Y1.1@8166.61,8479.45
NetC10_1: C10.1 IC2.5 | length 73.1
  Bottom Layer w10: IC2.5 C10.1
NetC11_2: C11.2 IC3.34 | length 204.4
  Top Layer w10: C11.2 C11.2@6890.24,8321.82 ; IC3.34 6994.98,8320.87 ; C11.2@6890.24,8321.82 cw(c6910,8302.06) 6910,8330 ; C11.2@6890.24,8321.82 cw(c6910,8302.06) 6910,8330 ; 6910,8330 6972.93,8330 ; 6972.93,8330 cw(c6972.93,8312.93) 6985,8325 ; 6972.93,8330 cw(c6972.93,8312.93) 6985,8325 ; 6985,8325 ccw(c6994.98,8334.98) 6994.98,8320.87 ; 6985,8325 ccw(c6994.98,8334.98) 6994.98,8320.87
NetD1_2: D1.2 J1.1
NetD2_2: D2.2 J2.1
NetIC3_27: IC3.27 R6.2 R7.2 | length 215.5
  Top Layer w10: R7.2 R6.2@7027.44,8555 ; R6.2@7027.44,8555 cw(c7027.44,8552.44) R6.2 ; R6.2@7027.44,8555 cw(c7027.44,8552.44) R6.2 ; 7030,8501.1 ccw(c7060.63,8501.1) IC3.27 cw(c7060.63,8501.1) 7030,8501.1 ; 7030,8501.1 R6.2
NetIC3_35: IC3.35 R9.2 | length 84.8
  Top Layer w10: IC3.35 R9.2@6963.74,8301.18 ; R9.2@6963.74,8301.18 ccw(c6963.74,8288.82) R9.2 cw(c6963.74,8288.82) R9.2@6963.74,8301.18
NetL1_1: L1.1 U1.5
NetLED1_1: LED1.1 R11.2 | length 206.9
  Bottom Layer w10: R11.2 cw(c7781.27,8689.56) 7781.27,8755 7825,8755 ccw(c7825,8827.43) 7876.21,8776.21 LED1.1
NetLED2_1: LED2.1 R12.2 | length 106.5
  Bottom Layer w10: R12.2 cw(c7728.35,8730.83) 7687.09,8772.09 LED2.1
NetLED3_1: LED3.1 R13.2 | length 97.5
  Bottom Layer w10: LED3.1 7550,8742.13 ccw(c7581.3,8742.13) R13.2
NetR1_1: R1.1 R2.2 U1.4
STM8_NRST: C7.2 IC2.1 P1.3 R8.1 | length 1018.1
  Bottom Layer w10: IC2.1 C7.2@7924.02,8540.24 ; P1.3 8610,8350 cw(c8610,8420) 8540,8420 8540,8500 ccw(c8440,8500) 8440,8600 8039.17,8600 ccw(c8039.17,8540) R8.1 C7.2@7925.75,8540 ; C7.2@7924.02,8540.24 cw(c7924.02,8539.25) C7.2 ; C7.2@7924.02,8540.24 cw(c7924.02,8539.25) C7.2 ; C7.2 cw(c7925.75,8539.25) C7.2@7925.75,8540 ; C7.2 cw(c7925.75,8539.25) C7.2@7925.75,8540
STM8_SWIM: IC2.26 P1.2 | length 1452.3
  Top Layer w10: v1(7600,8665) cw(c7605,8665) 7605,8670 8340,8670 cw(c8340,8570) 8440,8570 8440,8350 ccw(c8540,8350) 8540,8250 P1.2
  Bottom Layer w10: IC2.26 7596.26,8661.26 cw(c7600,8661.26) v1(7600,8665)
TOGGLE_1: IC2.32 R3.1 SW1.1 | length 2156.4
  Top Layer w10: R3.1 8527.44,7877.44 ccw(c8527.44,7880) SW1.1
  Bottom Layer w10: IC2.32 cw(c7883.39,8596.85) 7883.39,8695 8645,8695 cw(c8645,8595) 8745,8595 8745,7980 cw(c8645,7980) 8645,7880 SW1.1
TOGGLE_2: IC2.31 R4.1 SW1.3 | length 2647.1
  Top Layer w10: R4.1 8527.44,7507.44 ccw(c8527.44,7510) SW1.3
  Bottom Layer w10: IC2.31 7753.74,8615 cw(c7853.74,8615) 7853.74,8715 8670,8715 cw(c8670,8615) 8770,8615 8770,7610 cw(c8670,7610) 8670,7510 SW1.3
USB_B1_N: IC3.1 J3.2 | length 712.8
  Top Layer w10: J3.2 ccw(c6515.63,7935.08) 6526.35,7924.36 6539.14,7937.15 ccw(c6525,7951.29) 6545,7951.29 cw(c6565,7951.29) 6550.86,7965.44 6595.43,8010.01 cw(c6612.14,7993.3) 6612.14,8016.93 ccw(c6612.14,8040.57) 6628.86,8023.86 6686.53,8081.53 cw(c6771.29,7996.78) 6771.29,8116.64 6951.94,8116.64 ccw(c6951.94,8216.64) 7022.65,8145.93 7036.95,8160.24 ccw(c6980.54,8216.64) 7060.32,8216.64 7060.32,8249.69 IC3.1
USB_B1_P: IC3.2 J3.3 | length 712.7
  Top Layer w10: J3.3 cw(c6594.37,7935.08) 6583.65,7924.36 6567.93,7940.08 cw(c6575,7947.15) 6565,7947.15 cw(c6575,7947.15) 6567.93,7954.22 6603.72,7990.01 cw(c6620.43,7973.3) 6620.43,7996.93 ccw(c6620.43,8020.57) 6637.14,8003.86 6700.64,8067.35 cw(c6771.35,7996.64) 6771.35,8096.64 6951.99,8096.64 ccw(c6951.99,8216.51) 7036.75,8131.75 7051.12,8146.12 ; 7051.13,8146.12 ccw(c6980.65,8216.6) 7080.32,8216.6 IC3.2
USB_B2_N: IC3.3 J3.6 | length 831.4
  Top Layer w10: J3.6 6550.37,7851.51 cw(c6595,7806.89) 6595,7870 ccw(c6595,7918.28) 6629.14,7884.14 6630,7885 ccw(c6593.79,7921.21) 6645,7921.21 6645,7940 cw(c6669.14,7940) 6652.07,7957.07 6730.71,8035.71 cw(c6801.42,7965) 6801.42,8065 6973.58,8065 ccw(c6973.58,8165) 7044.29,8094.29 7075,8125 ccw(c7014.64,8185.36) 7100,8185.36 IC3.3
USB_B2_P: IC3.4 J3.7 | length 822.9
  Top Layer w10: J3.7 ccw(c6594.37,7870.86) 6632.61,7832.61 6645,7845 cw(c6693.28,7796.72) 6693.28,7865 6710,7865 cw(c6710,7816.72) 6744.14,7850.86 6750,7845 ccw(c6798.28,7893.28) 6798.28,7825 6840,7825 ccw(c6840,7897.43) 6891.21,7846.21 7090.4,8045.4 ccw(c7019.69,8116.11) 7119.69,8116.11 IC3.4
USB_B3_N: IC3.6 J4.2 | length 814.8
  Top Layer w10: IC3.6 7158.74,8249.68 7158.74,8187.64 ccw(c7278.63,8187.64) 7193.86,8102.86 7201.6,8095.12 ccw(c7286.38,8179.89) 7286.38,8060 7609.87,8060 cw(c7609.87,7960) 7680.58,8030.71 7752.07,7959.22 cw(c7745,7952.15) 7755,7952.15 cw(c7745,7952.15) 7752.07,7945.08 7736.35,7929.36 cw(c7725.63,7940.08) J4.2
USB_B3_P: IC3.7 J4.3 | length 814.6
  Top Layer w10: IC3.7 7178.74,8187.68 ccw(c7278.74,8187.68) 7208.03,8116.97 7215.71,8109.29 ccw(c7286.42,8180) 7286.42,8080 7609.92,8080 cw(c7609.92,7960.11) 7694.69,8044.88 7769.14,7970.44 cw(c7755,7956.29) 7775,7956.29 ccw(c7795,7956.29) 7780.86,7942.15 7793.65,7929.36 ccw(c7804.37,7940.08) J4.3
USB_B4_N: IC3.8 J4.6 | length 1043.5
  Top Layer w5: IC3.8 7198.43,8200 ccw(c7298.43,8200) 7298.43,8100 7713.58,8100 cw(c7713.58,8000) 7784.29,8070.71 7830.86,8024.14 cw(c7796.72,7990) 7845,7990 7845,7910 cw(c7805,7910) 7805,7870 ccw(c7805,7794.82) 7751.84,7847.98 J4.6
USB_B4_P: IC3.9 J4.7 | length 1044
  Top Layer w5: IC3.9 7218.11,8195.78 ccw(c7275.78,8195.78) 7235,8155 7240.71,8149.29 ccw(c7311.42,8220) 7311.42,8120 7590,8120 7617.5,8120 ccw(c7617.5,8132.5) 7630,8132.5 7630,8145.71 cw(c7642.5,8145.71) 7655,8145.71 7655,8132.5 ccw(c7667.5,8132.5) 7667.5,8120 7695,8120 7723.58,8120 cw(c7723.58,8020) 7794.29,8090.71 7835.25,8049.75 cw(c7775.5,7990) 7860,7990 7860,7910 cw(c7781.3,7910) 7836.95,7854.35 J4.7
USB_MUX_N: IC1.9 IC3.30 | length 1130.2
  Top Layer w10: IC3.30 6986.31,8399.61 ; IC1.9 7295,8935.36 ; 6986.31,8399.61 cw(c6986.31,8486.31) v1(6925,8425) ccw(c6986.31,8486.31) 6986.31,8399.61 ; 7295,8935.36 ccw(c7380.36,8935.36) v1(7320,8875) cw(c7380.36,8935.36) 7295,8935.36
  Bottom Layer w10: v1(6925,8425) 7199.36,8699.36 7202.89,8702.89 7224.11,8724.11 cw(c7234.71,8713.5) 7245.32,8724.11 7278.24,8691.18 ccw(c7288.85,8701.79) 7299.45,8691.18 ccw(c7288.85,8701.79) 7299.45,8712.4 7266.53,8745.32 cw(c7277.14,8755.93) 7266.53,8766.53 7302.32,8802.32 7310.47,8812.46 ccw(c7259.64,8845) 7313.07,8816.93 ccw(c7259.64,8845) 7320,8845 v1(7320,8875)
USB_MUX_ON: IC1.3 IC2.18 | length 942.9
  Top Layer w10: IC1.3 7390.78,9095.83 ccw(c7390.78,9144.22) v1(7425,9110)
  Bottom Layer w10: v1(7425,9110) 7425,8385 ccw(c7460,8385) 7460,8350 7506.89,8350 ccw(c7506.89,8351.26) IC2.18
USB_MUX_P: IC1.10 IC3.31 | length 1199.4
  Top Layer w10: IC3.31 6918.47,8379.92 ; IC1.10 7314.69,8991.11 ; 6918.47,8379.92 cw(c6918.47,8448.47) v1(6870,8400) ccw(c6918.47,8448.47) 6918.47,8379.92 ; 7314.69,8991.11 ccw(c7401.11,8991.11) v1(7340,8930) cw(c7401.11,8991.11) 7314.69,8991.11
  Bottom Layer w10: v1(7340,8930) 7320,8930 ; 6880.61,8425.61 ccw(c6906.21,8400) v1(6870,8400) cw(c6906.21,8400) 6880.61,8425.61 ; 6880.61,8425.61 7275,8820 ccw(c7250.86,8844.14) 7285,8844.14 7285,8895 ; 7285,8895 cw(c7320,8895) 7320,8930 ; 7285,8895 cw(c7320,8895) 7320,8930
USB_MUX_S: IC1.4 IC2.17 | length 1048
  Top Layer w10: IC1.4 cw(c7359.17,9095.83) 7359.17,9160 v1(7375,9160)
  Bottom Layer w10: v1(7375,9160) 7375,9119.14 ccw(c7409.14,9119.14) 7385,9095 cw(c7348.79,9058.79) 7400,9058.79 7400,8375 ccw(c7455.24,8375) 7455.24,8319.76 IC2.17
USB_RST: C6.1 IC3.26 R5.1 | length 299
  Top Layer w10: R5.1 7080,8680 ; C6.1@7080,8720 7080,8680 ; IC3.26 7080.32,8620 7080,8620 7080,8680
USB_SCL: IC2.12 IC3.24 | length 1575.4
  Top Layer w10: IC3.24@7120,8470.47 IC3.24 7119.69,8529.69 7155,8565 v1(7155,8605)
  Bottom Layer w10: v1(7155,8605) 7285,8605 ; IC2.12 7690.75,8205.75 ; 7270,8270 ccw(c7370,8270) 7370,8170 ; 7270,8270 ccw(c7370,8270) 7370,8170 ; 7270,8270 7270,8520 ; 7270,8520 cw(c7280,8520) 7280,8530 ; 7270,8520 cw(c7280,8520) 7280,8530 ; 7280,8530 7290,8530 ; 7285,8605 cw(c7285,8565) 7325,8565 ; 7285,8605 cw(c7285,8565) 7325,8565 ; 7290,8530 ccw(c7290,8565) 7325,8565 ; 7290,8530 ccw(c7290,8565) 7325,8565 ; 7370,8170 7655,8170 ; 7655,8170 ccw(c7655,8205.75) 7690.75,8205.75 ; 7655,8170 ccw(c7655,8205.75) 7690.75,8205.75
USB_SDA: IC2.11 IC3.22 | length 1325.6
  Top Layer w10: IC3.22 7159.06,8504.06 ; v1(7225,8535) 7225,8530.86 7219.14,8525 7180,8525 ; 7159.06,8504.06 cw(c7180,8504.06) 7180,8525 ; 7159.06,8504.06 cw(c7180,8504.06) 7180,8525
  Bottom Layer w10: v1(7225,8535) 7225,8480 7240,8465 7240,8240 ; IC2.11 7722.24,8187.24 ; 7240,8240 ccw(c7340,8240) 7340,8140 ; 7240,8240 ccw(c7340,8240) 7340,8140 ; 7340,8140 7675,8140 ; 7675,8140 ccw(c7675,8187.24) 7722.24,8187.24 ; 7675,8140 ccw(c7675,8187.24) 7722.24,8187.24
USB_SEL1: IC2.13 IC3.25 | length 1259.9
  Top Layer w10: IC3.25 7100,8549.59 7110,8559.59 v1(7110,8565) ; v1(7285,8565) v1(7350,8525)
  Bottom Layer w10: v1(7110,8565) v1(7285,8565) ; v1(7350,8525) 7300,8475 7300,8300 ; IC2.13 7659.25,8224.25 ; 7300,8300 ccw(c7400,8300) 7400,8200 ; 7300,8300 ccw(c7400,8300) 7400,8200 ; 7400,8200 7635,8200 ; 7635,8200 ccw(c7635,8224.25) 7659.25,8224.25 ; 7635,8200 ccw(c7635,8224.25) 7659.25,8224.25
USB_TOP_1_N: IC1.1 J2.2 | length 1061.5
  Top Layer w10: IC1.1 7614.2,9045.16 ccw(c7614.2,9070.96) 7640,9070.96 7640,9075 cw(c7645,9075) 7645,9080 7830,9080 ccw(c7860,9080) 7855,9050.42 ccw(c7860,9080) 7860,9050 7890,9050 cw(c7890,9035) 7905,9035 7905,9008.94 ccw(c7920,9008.94) 7935,9008.94 7935,9035 cw(c7950,9035) 7950,9050 7980,9050 8179.12,9050 cw(c8179.12,8950.26) J2.2
USB_TOP_1_P: IC1.2 J2.3 | length 1060.9
  Top Layer w10: IC1.2@7321.1,9065.16 IC1.2 7609.84,9064.84 ccw(c7609.84,9075) 7620,9075 cw(c7645,9075) 7645,9100 7830,9100 cw(c7830,9080) 7850,9080 ccw(c7860,9080) 7860,9070 8237.75,9070 cw(c8237.75,8970) 8299.03,9049.02 cw(c8237.75,8970) 8308.46,9040.71 J2.3
USB_TOP_2_N: IC1.7 J1.2 | length 1033.2
  Top Layer w10: J1.2 6709.37,9119.21 cw(c6709.37,9019.21) 6780.08,9089.92 6795.55,9074.45 ccw(c6866.26,9145.16) 6866.26,9045.16 6993.91,9045.16 7028.91,9045.16 cw(c7028.91,9030.16) 7043.91,9030.16 7043.91,8985.97 ccw(c7058.91,8985.97) 7073.91,8985.97 7073.91,9030.16 cw(c7088.91,9030.16) 7088.91,9045.16 7155,9045.16 IC1.7
USB_TOP_2_P: IC1.6 J1.3 | length 1032
  Top Layer w10: J1.3 cw(c6352.4,9119.21) 6352.4,9170 6730.65,9170 cw(c6730.65,9111.21) 6772.22,9152.78 6823.8,9101.2 ccw(c6911.58,9188.98) 6911.58,9064.84 IC1.6
USB_XTAL1: C12.2 IC3.32 R10.1 X1.1 | length 767.1
  Top Layer w10: C12.2 R10.1@6600.75,8363.31 ; IC3.32 6832.64,8360.24 ; R10.1 ccw(c6590,8363.31) R10.1@6600.75,8363.31 ; R10.1 ccw(c6590,8363.31) R10.1@6600.75,8363.31 ; R10.1 6621.58,8352.56 ; 6621.58,8352.56 ccw(c6621.58,8403.74) X1.1 ; 6621.58,8352.56 ccw(c6621.58,8403.74) X1.1 ; X1.1@6672.76,8397.24 ccw(c6720,8397.24) 6720,8350 ; X1.1@6672.76,8397.24 ccw(c6720,8397.24) 6720,8350 ; X1.1@6672.76,8397.24 X1.1 ; 6720,8350 6807.93,8350 ; 6807.93,8350 ccw(c6807.93,8367.07) 6820,8355 ; 6807.93,8350 ccw(c6807.93,8367.07) 6820,8355 ; 6820,8355 cw(c6832.64,8342.36) 6832.64,8360.24 ; 6820,8355 cw(c6832.64,8342.36) 6832.64,8360.24
USB_XTAL2: C13.1 IC3.33 R10.2 X1.3 | length 776.5
  Top Layer w10: C13.1 R10.2 6716.06,8297.44 ; IC3.33 6999.45,8340.55 ; 6716.06,8297.44 cw(c6716.06,8246.26) X1.3 ; 6716.06,8297.44 cw(c6716.06,8246.26) X1.3 ; X1.3 X1.3@6781.26,8246.26 ; X1.3@6781.26,8246.26 ccw(c6781.26,8280) 6815,8280 ; X1.3@6781.26,8246.26 ccw(c6781.26,8280) 6815,8280 ; 6815,8280 6815,8315 ; 6815,8315 cw(c6845,8315) 6845,8345 ; 6815,8315 cw(c6845,8315) 6845,8345 ; 6845,8345 6995,8345 ; 6995,8345 ccw(c6999.45,8345) 6999.45,8340.55 ; 6995,8345 ccw(c6999.45,8345) 6999.45,8340.55
pads on no net: IC2.8 IC2.14 IC2.15 IC2.16 IC2.19 IC2.20 IC2.21 IC2.22 IC2.23 IC2.24 IC2.25 IC2.27 IC3.12 IC3.14 IC3.16 IC3.17 IC3.18 IC3.19 IC3.20 IC3.21 IC3.28

## Polygon pours and split planes (outlines as drawn)
GND on Top Layer "GND_POUR_T" (solid, remove dead copper, pour order 27): 5805,9490 5805,7300 8795,7300 8795,9490
NetD1_2 on Top Layer "NETD1_2_L01_P025" (solid, pour order 25): 6321.02,9260 6316.42,9260 ccw(c6316.42,9160) 6245.71,9230.71 6245,9230 cw(c6196.72,9278.28) 6196.72,9210 6180,9210 ccw(c6180,9175) 6145,9175 6145,9000 ccw(c6220,9000) 6220,8925 6385,8925 ccw(c6385,8950) 6410,8950 6410,9020 ccw(c6380,9020) 6380,9050 ccw(c6380,9020) 6350,9020 6350,9015 cw(c6305,9015) 6305,8970 6300,8970 cw(c6300,9025) 6245,9025 6245,9135 cw(c6307.5,9137.5) 6305,9200
NetD2_2 on Top Layer "NETD2_2_L01_P024" (solid, pour order 24): 8250,9090 cw(c8250,9120) 8220,9120 8220,9165 cw(c8262.5,9162.5) 8265,9205 8475,9205 cw(c8475,9175) 8505,9175 8505,8955 cw(c8470,8955) 8470,8920 8375,8920 ccw(c8377.07,8890.86) 8355,8910 cw(c8327.93,8941.2) 8325,8900 8285,8900 8285,8960 8315.86,8960 ccw(c8315.86,8994.14) 8340,8970 cw(c8364.14,8945.86) 8364.14,8980 8435,8980 ccw(c8435,8995) 8450,8995 8450,9150 ccw(c8435,9150) 8435,9165 8320,9165 ccw(c8320,9125) 8280,9125 8280,9120 cw(c8250,9120)
3.3V on Top Layer "3.3V_L01_P019" (solid, pour order 19): 5870,7499.58 5870,7435 ccw(c5970,7435) 5970,7335 8170,7335 ccw(c8170,7435) 8270,7435 8270,7545 ccw(c8240,7545) 8240,7575 7980,7575 ccw(c7980,7545) 7950,7545 cw(c7910,7545) 7910,7505 6345,7505 ccw(c6345,7465) 6305,7465 cw(c6268.68,7465) 6268.68,7428.68 6050.9,7428.68 cw(c6050.9,7499.58) 5980,7499.58
3.3V on Top Layer "3.3V_L01_P022" (solid, pour order 22): 8345,8105 ccw(c8290,8105) 8290,8160 8112.05,8160 cw(c8112.05,8232.05) 8040,8232.05 8040,8340 ccw(c8010,8340) 8010,8370 7905,8370 ccw(c7905,8350) 7885,8350 7885,8140 ccw(c7950,8140) 7950,8075 8075,8075 cw(c8075,8020) 8130,8020 cw(c8135,8020) 8135,8025 8345,8025
3.3V on Top Layer "3.3V_L01_P021" (solid, pour order 21): 8240,7575 cw(c8240,7545) 8270,7545 cw(c8290,7545) 8290,7565 8350,7565 8350,7660 ccw(c8320,7660) 8320,7690 cw(c8320,7730) 8280,7730 8280,7890 cw(c8310,7890) 8310,7920 8345,7920 8345,8090 8165,8090 ccw(c8165,8055) 8130,8055 8130,7675 cw(c8030,7675) 8030,7575
3.3V on Top Layer "3.3V_L01_P017" (solid, pour order 17): 6165,8035 6390,8035 6390,8042.93 ccw(c6372.93,8042.93) 6385,8055 6165,8055
3.3V on Top Layer "3.3V_L01_P003" (solid, pour order 3): 5870,8035 6165,8035 6165,8055 6095,8055 cw(c6095,8070) 6080,8070 6080,8115 5870,8115
5V on Top Layer "5V_L01_P004" (solid, pour order 4): 6235,8265 6255,8265 ccw(c6230.86,8289.14) 6265,8289.14 6265,8340 ccw(c6240.86,8364.14) 6275,8364.14 6275,8475 6335,8475 6335,8235 cw(c6325,8235) 6325,8225 6235,8225
3.3V on Top Layer "3.3V_L01_P016" (solid, pour order 16): 5870,8035 5870,7505 ccw(c5925,7505) 5925,7450 ccw(c5925,7505) 5980,7505 5980,8035
5V on Top Layer "5V_L01_P014" (solid, pour order 14): 5955,8765 5955,8710 ccw(c6015,8710) 6015,8650 cw(c6015,8605) 6060,8605 6060,8550 cw(c6020,8550) 6020,8510 5945,8510 ccw(c5945,8470) 5905,8470 5905,8400 6075,8400 6075,8465 cw(c6115,8465) 6115,8505 6240,8505 cw(c6240,8470) 6275,8470 6275,8465 6335,8465 6335,8490 ccw(c6290,8490) 6290,8535 cw(c6290,8575) 6250,8575 6250,8650 ccw(c6205,8650) 6205,8695 6165,8695 cw(c6165,8765) 6095,8765
5V on Top Layer "5V_L01_P013" (solid, pour order 13): 6212.5,9405 6250,9405 cw(c6250,9370) 6285,9370 ccw(c6310,9370) 6310,9345 6485,9345 6485,9450 6055,9450 ccw(c6055,9350) 5955,9350 5955,8765 6095,8765 6095,9335 cw(c6165,9335) 6165,9405
5V on Top Layer "5V_L01_P012" (solid, pour order 12): 8015,9105 8015,9245 ccw(c7915,9245) 7915,9345 6485,9345 6485,9450 8000,9450 cw(c8000,9350) 8100,9350 8100,9105
NetD1_2 on Top Layer "NETD1_2_L01_P011" (solid, pour order 11): 6585,9200 6585,9260 6325,9260 ccw(c6325,9240) 6305,9240 6305,9200
NetD2_2 on Top Layer "NETD2_2_L01_P010" (solid, pour order 10): 8285,8900 8035,8900 cw(c8035,8925) 8010,8925 8010,9000 8100,9000 8100,8985 ccw(c8125,8985) 8125,8960 8285,8960
GND on Top Layer "GND_L01_P007" (solid, pour order 7): 6200,8330 ccw(c6175,8330) 6175,8355 6135,8355 cw(c6135,8380) 6110,8380 6110,8455 cw(c6125,8455) 6125,8470 6235,8470 cw(c6235,8455) 6250,8455 6250,8305 cw(c6245,8305) 6245,8300 6200,8300
GND on Top Layer "GND_L01_P006" (solid, pour order 6): 6200,8225 6220,8225 6220,8275 cw(c6245,8275) 6245,8300 6245,8340 6200,8340
5V on Top Layer "5V_L01_P005" (solid, pour order 5): 6160,8225 6160,8260 ccw(c6120,8260) 6120,8300 5950,8300 cw(c5950,8345) 5905,8345 5905,8470 6035,8470 cw(c6035,8430) 6075,8430 6075,8385 ccw(c6125,8385) 6125,8335 6145,8335 cw(c6145,8295) 6185,8295 6185,8225
NetR1_1 on Top Layer "NETR1_1_L01_P001" (solid, pour order 1): 6145,8085 ccw(c6145,8100) 6160,8100 6160,8145 6185,8145 6185,8120 ccw(c6220,8120) 6220,8085 6235,8085 6235,8065 6145,8065
NetL1_1 on Top Layer "NETL1_1_L01_P000" (solid, pour order 0): 6080,8220 ccw(c6092.5,8222.5) 6095,8210 6240,8210 cw(c6240,8190) 6260,8190 6260,8120 6235,8120 6235,8155 ccw(c6215,8155) 6215,8175 5876.57,8175 5876.57,8255 6080,8255
GND on Bottom Layer "GND POUR_B" (solid, pour order 23): 5805,9490 8795,9490 8795,7300 5805,7300
3.3V on Bottom Layer "3.3V_L02_P018" (solid, pour order 18): 7815,8395 7815,8340 7880,8340 cw(c7880,8320) 7900,8320 7900,8310 cw(c7885,8310) 7885,8295 7775,8295 7775,8235 ccw(c7805,8235) 7805,8205 8010,8205 ccw(c8010,8235) 8040,8235 8040,8370 ccw(c8015,8370) 8015,8395
GND on Bottom Layer "GND_L02_P008" (solid, pour order 8): 6179.88,8354.52 6135.48,8354.52 cw(c6135.48,8380) 6110,8380 6110,8525 ccw(c6090,8525) 6090,8545 5925,8545 cw(c5925,8565) 5905,8565 5905,8650 6380,8650 6380,8580 cw(c6345,8580) 6345,8545 6265,8545 ccw(c6265,8530) 6250,8530 6250,8360 cw(c6245,8360) 6245,8355
GND on Bottom Layer "GND_L02_P015" (solid, pour order 15): 5905,8607.5 5905,9270 cw(c6005,9270) 6005,9370 6220,9370 cw(c6220,9315) 6275,9315 6275,8995 ccw(c6325,8995) 6325,8945 cw(c6325,8915) 6355,8915 cw(c6330,8915) 6330,8890 6325,8890 ccw(c6325,8840) 6275,8840 6275,8785 ccw(c6325,8785) 6325,8735 cw(c6325,8680) 6380,8680 6380,8605

## Silkscreen, mask and mechanical layers (free items; w line width, h text height)
Mechanical 1:
  the board outline again, w10

## Text inside footprints (layer, text, board x,y; h text height)
LED1: Top Overlay "K" at 7865,8765 h30 r270; Top Courtyard "K" at 7865,8765 h30 r270
LED2: Top Overlay "K" at 7680,8765 h30 r270; Top Courtyard "K" at 7680,8765 h30 r270
LED3: Top Overlay "K" at 7500,8765 h30 r270; Top Courtyard "K" at 7500,8765 h30 r270